# Altium PCB PCB1.PcbDoc
Units mil, origin at the board's own origin, x right, y up, seen from the top; angles counter-clockwise.
Board outline 1270 x 885 mil, 2 copper layers (Top Layer, Bottom Layer); 34 components, 20 nets, 100 pads, 44 vias.
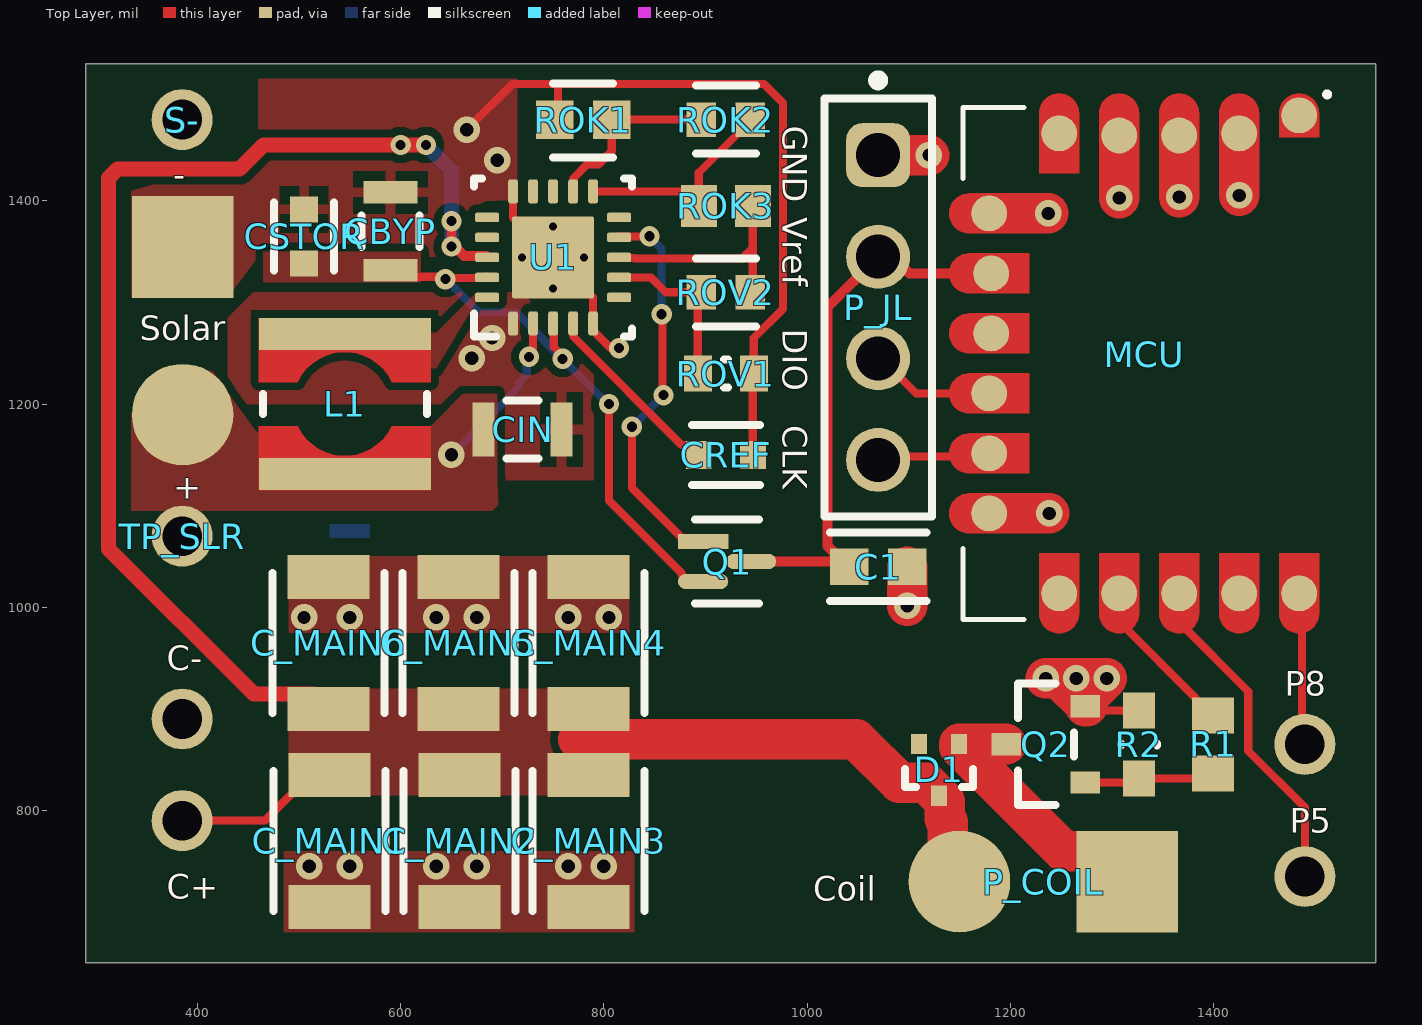
[diagram p0: Top Layer view]
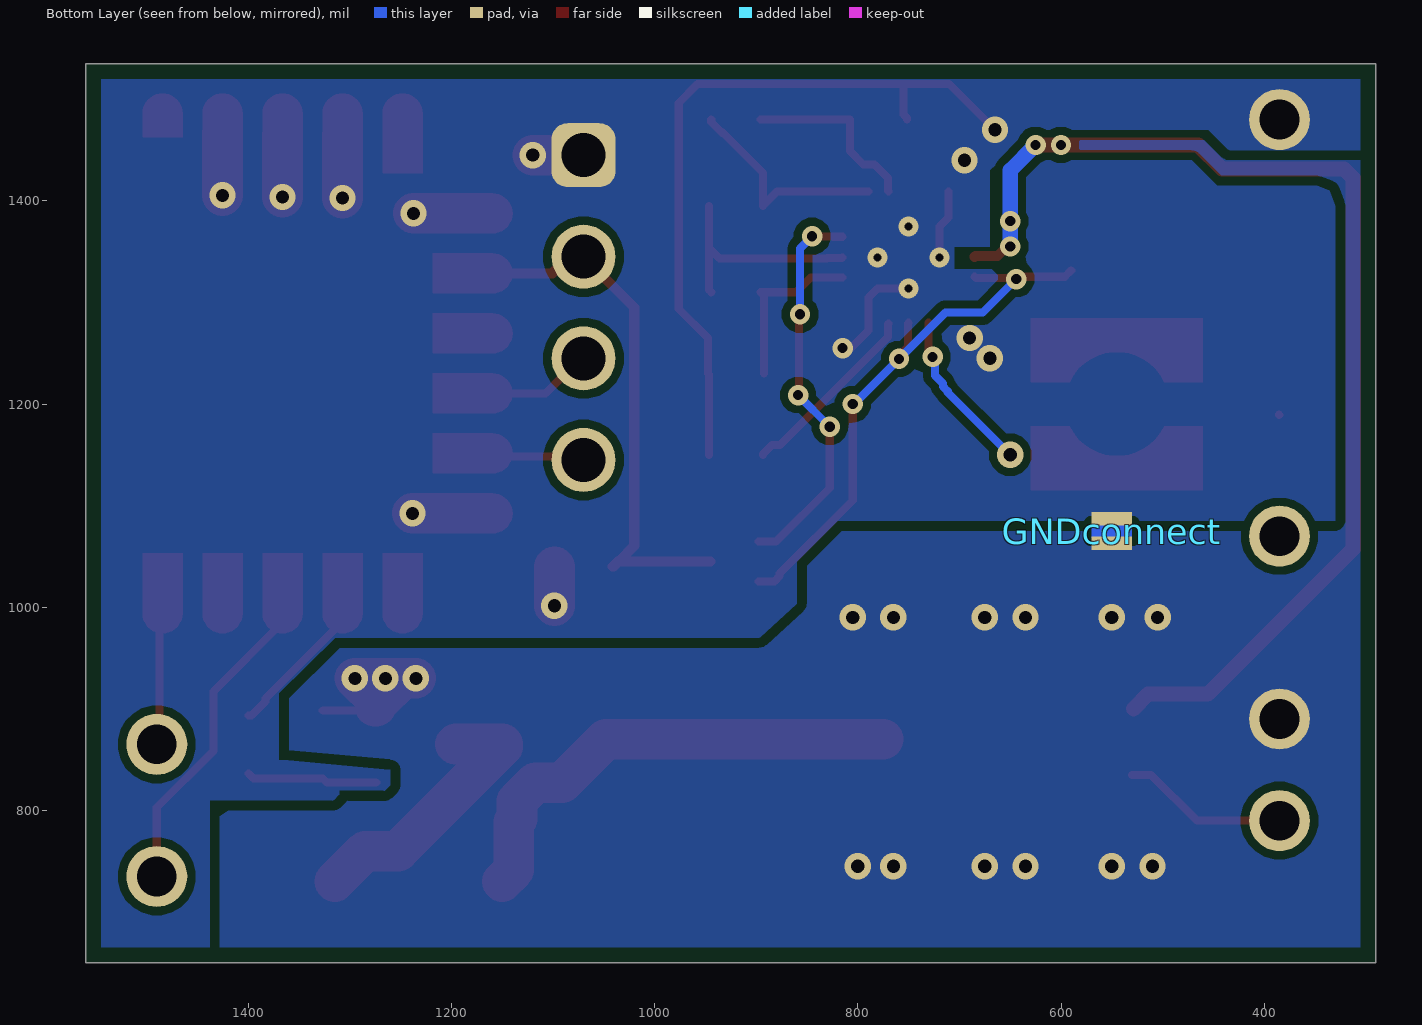
[diagram p1: Bottom Layer view, seen from below]
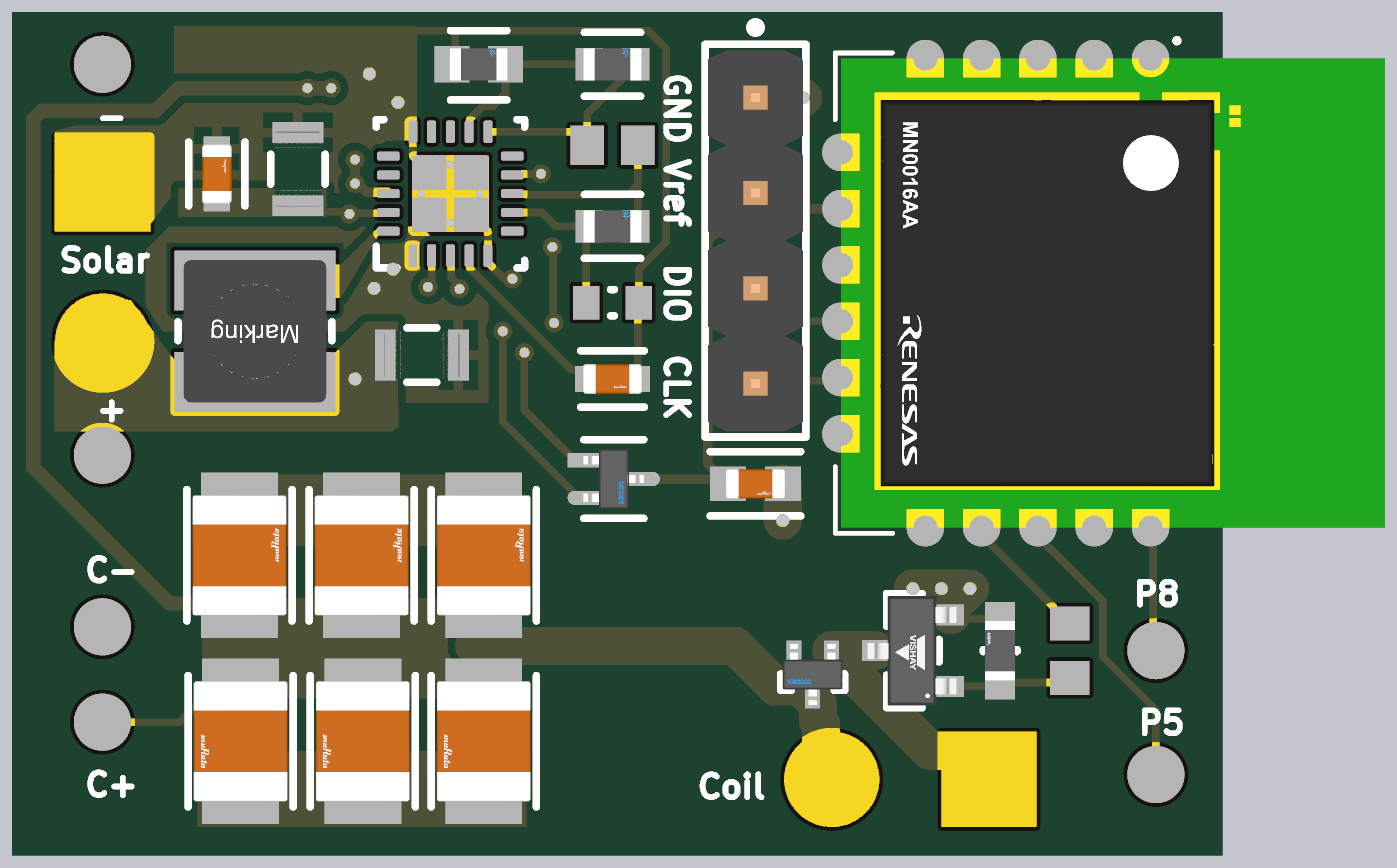
[diagram p2: 3D render of the assembled board from above, using the file's embedded part models]

## Layer stack, top to bottom
Top Solder: solder mask 0.4, Solder Resist, Dk 3.5
Top Layer: signal copper 1.4
Dielectric 1: dielectric 12.6, FR-4, Dk 4.8
Bottom Layer: signal copper 1.4
Bottom Solder: solder mask 0.4, Solder Resist, Dk 3.5

## Board outline
290,650 290,1535 1560,1535 1560,650

## Design rules (kind name [scope] priority, off if disabled: settings)
BoardOutlineClearance [All] p1: gap=15 ignorepadtopadclearanceinfootprint=FALSE
Clearance GNDPourClearance [InNamedPolygon('SGND_L02_P023') vs InNamedPolygon('PGND_L02_P024')] p1: gap=10 ignorepadtopadclearanceinfootprint=TRUE
Clearance PolyTrackConnect [InPolygon AND InNet('SGND') vs IsTrack AND InNet('SGND')] p2: gap=-10 ignorepadtopadclearanceinfootprint=TRUE
Clearance GNDConnect [InComponent('GNDconnect') vs InComponent('GNDconnect')] p3: gap=-10 ignorepadtopadclearanceinfootprint=TRUE
Clearance SGND_PGND [(InNet('SGND') AND IsTrack) vs InNet('PGND')] p4: gap=-10 ignorepadtopadclearanceinfootprint=TRUE
Clearance PolygonPour_C_IN_1 [InNet('NetC_IN_1') vs InNet('NetC_IN_1')] p5: gap=8 ignorepadtopadclearanceinfootprint=TRUE except(-10: Arc-Fill Arc-Poly Arc-Region Track-Fill Track-Poly Track-Region SMDPad-Fill SMDPad-Poly SMDPad-Region THPad-Fill THPad-Poly THPad-Region Via-Fill Via-Poly Via-Region Fill-Fill Fill-Poly Fill-Region Fill-Hole Poly-Poly Poly-Region Poly-Hole Region-Region Region-Hole)
Clearance PolygonPour_C_BYP_1 [InNet('NetC_BYP_1') vs InNet('NetC_BYP_1')] p6: gap=8 ignorepadtopadclearanceinfootprint=TRUE except(-10: Arc-Fill Arc-Poly Arc-Region Track-Fill Track-Poly Track-Region SMDPad-Fill SMDPad-Poly SMDPad-Region THPad-Fill THPad-Poly THPad-Region Via-Fill Via-Poly Via-Region Fill-Fill Fill-Poly Fill-Region Fill-Hole Poly-Poly Poly-Region Poly-Hole Region-Region Region-Hole)
Clearance PolygonPour_L1_2 [InNet('NetL1_2') vs InNet('NetL1_2')] p7: gap=8 ignorepadtopadclearanceinfootprint=TRUE except(-10: Arc-Fill Arc-Poly Arc-Region Track-Fill Track-Poly Track-Region SMDPad-Fill SMDPad-Poly SMDPad-Region THPad-Fill THPad-Poly THPad-Region Via-Fill Via-Poly Via-Region Fill-Fill Fill-Poly Fill-Region Fill-Hole Poly-Poly Poly-Region Poly-Hole Region-Region Region-Hole)
Clearance [All] p8: gap=8 ignorepadtopadclearanceinfootprint=TRUE
ComponentClearance [InComponent('GNDconnect')] p1: gap=-1000 collisioncheckmode=3 verticalgap=-1000 showdistances=TRUE donotcheckwithout3dbody=TRUE
MinimumAnnularRing [All] p1: minimumring=5
MinimumSolderMaskSliver [All] p1: minsoldermaskwidth=8
PolygonConnect DirectConnect_C_BYP_1 [InNet('NetC_BYP_1') vs InNet('NetC_BYP_1')] p1: connectstyle=Direct reliefconductorwidth=10 reliefentries=4 polygonreliefangle="90 Angle" airgapwidth=10
PolygonConnect DirectConnect_L1 [InNet('NetL1_2') vs InNet('NetL1_2')] p2: connectstyle=Direct reliefconductorwidth=10 reliefentries=4 polygonreliefangle="90 Angle" airgapwidth=10
PolygonConnect DirectConnect_SGND [NOT((InComponent('CSTOR') OR InComponent('CBYP')) OR InComponent('CIN')) AND InNet('SGND') vs NOT((InComponent('CSTOR') OR InComponent('CBYP')) OR InComponent('CIN')) AND InNet('SGND')] p3: connectstyle=Direct reliefconductorwidth=10 reliefentries=4 polygonreliefangle="90 Angle" airgapwidth=8
PolygonConnect DirectConnect_VBAT [InNet('VBAT') vs InNet('VBAT')] p4: connectstyle=Direct reliefconductorwidth=10 reliefentries=4 polygonreliefangle="90 Angle" airgapwidth=8
PolygonConnect DirectConnect_PGND [InNet('PGND') vs InNet('PGND')] p5: connectstyle=Direct reliefconductorwidth=10 reliefentries=4 polygonreliefangle="90 Angle" airgapwidth=8
PolygonConnect DirectConnect_C_IN_1 [InNet('NetC_IN_1') vs InNet('NetC_IN_1')] p6: connectstyle=Direct reliefconductorwidth=10 reliefentries=4 polygonreliefangle="90 Angle" airgapwidth=10
PolygonConnect [All] p7: connectstyle=Relief reliefconductorwidth=10 reliefentries=4 polygonreliefangle="90 Angle" airgapwidth=10
RoutingVias [All] p1: holewidth=13 width=26 viastyle="Through Hole" minholewidth=10 minwidth=20 maxholewidth=28 maxwidth=50
SolderMaskExpansion [All] p1: expansion=4 istentingtop=FALSE
SupplyNets "Schematic Supply Nets_1" [InNet('PGND')] p1: voltage=0.000
SupplyNets "Schematic Supply Nets" [InNet('SGND')] p2: voltage=0.000
Width [All] p1: maxlimit=50 minlimit=8 preferedwidth=10 minimp=50.000000 maximp=50.000000 favimp=50.000000
28 further rules are at their usual default settings.

## Components (designator, comment, footprint, x,y, rotation, side; value= is the part's Value field where it differs from the comment)
C1 "GRM188R72A104KA35D" FP-GRM188-0_1-e0_2_0_5-IPC_B 1070,1040 r0 top
C+ "TP" Test_point 385,790 r90 top (schematic designator TP_VBAT)
C- "TP" Test_point 385,890 r90 top (schematic designator TP_GND)
C_MAIN1 "GRM32ER60J227ME05L" FP-GRM32E-0_3-MFG 530,770 r270 top
C_MAIN2 "GRM32ER60J227ME05L" FP-GRM32E-0_3-MFG 658.12,770 r270 top
C_MAIN3 "GRM32ER60J227ME05L" FP-GRM32E-0_3-MFG 785,770 r270 top
C_MAIN4 "GRM32ER60J227ME05L" FP-GRM32E-0_3-MFG 785,965 r90 top
C_MAIN5 "GRM32ER60J227ME05L" FP-GRM32E-0_3-MFG 656.88,965 r90 top
C_MAIN6 "GRM32ER60J227ME05L" FP-GRM32E-0_3-MFG 528.76,965 r90 top
CBYP "CGA4J1X7R1H475K125AC" FP-CGA4J-IPC_C 590,1370 r90 top (schematic designator C_BYP)
CIN "CGA4J1X7R1H475K125AC" FP-CGA4J-IPC_C 720,1175 r0 top (schematic designator C_IN)
CREF "GCM188R72A103KA37D" FP-GCM188-0_1-MFG 920,1150 r0 top (schematic designator C_REF)
CSTOR "GCM188R72A103KA37D" FP-GCM188-0_1-MFG 505,1365 r90 top (schematic designator C_STOR)
D1 "BAT54STA" FP-SOT523-MFG 1130,840 r270 top value=10pF
GNDconnect "GNDconnect" GNDconnect 550,1075 r270 bottom net-tie
L1 "744031220" WE-TPC_3816 545,1200 r180 top
MCU "DA14531MOD-00F0100C" MN0016AA_MFG 1445,1240 r270 top (schematic designator MD)
P5 "TP" Test_point 1490,735 r90 top (schematic designator TP_P5)
P8 "TP" Test_point 1490,865 r90 top (schematic designator TP_P8)
P_COIL "Paired_pads" Paired_pads 1215,730 r270 top
P_JL "61300411121" 61300411121 1070,1295 r270 top
Q1 "DMG1013T-7" FP-SOT523-IPC_B 921.36,1045 r0 top
Q2 "SI2302CDS-T1-E3" FP-S-03946-MFG 1235,865 r180 top
R1 "ERJ-3EKF4700V" RESC1608X55X30ML15T15 1399.64,865 r270 top
R2 "RC0603FR-07100KL" FP-RC0603-0_55-MFG 1326.63,865 r90 top
ROK1 "CRCW06035M62FKEA" FP-CRCW0603-e3-IPC_B 779.68,1480 r0 top (schematic designator R_OK1)
ROK2 "CRCW06035M49FKEA" FP-CRCW0603-e3-IPC_C 920,1480 r0 top (schematic designator R_OK2)
ROK3 "CRCW06031M87FKEA" RESC1609X50X30ML10T20 920,1395 r0 top (schematic designator R_OK3)
ROV1 "7M68 1% 0603(1608)" RESC0603(1608)_L 920,1230 r180 top value="7680000.00 Ohm" (schematic designator R_OV1)
ROV2 "CRCW06035M36FKEA" FP-CRCW0603-e3-IPC_C 920,1310 r0 top (schematic designator R_OV2)
S- "TP" Test_point 385,1480 r90 top (schematic designator TP_SGND)
Solar "Paired_pads" Paired_pads 385.45,1254.55 r0 top (schematic designator P_SLR)
TP_SLR "TP" Test_point 385,1070 r90 top
U1 "BQ25505RGRR" RGR0020A_V 750,1344.3 r90 top

## Footprints (in the part's own frame and the unit in brackets; to place one, negate y for a bottom-side part, rotate by r counter-clockwise, add the part's x,y. Pads: shape width x height; smd on the part's side, far side on the other; paste and mask are expansions set on the pad)
61300411121 [mm] "Pin Header, pitch 2.54 mm, THT, Vertical, single row, 4p"
  rrect50% 1.6x1.6 hole 1.1: 1(-3.81,0)
  round 1.6 hole 1.1: 2(-1.27,0) 3(1.27,0) 4(3.81,0)
  silkscreen extent -5.8,-1.35 5.23,1.35, body extent -5.08,-1.27 5.08,1.27, height 8.57
FP-CGA4J-IPC_C [mm]
  rect 0.556x1.356 smd paste+0 mask+0: 1(-0.975,0) 2(0.975,0)
  silkscreen extent -0.4,-0.72 0.4,0.72, body extent -1.35,-0.82 1.35,0.82, height 0.25
FP-CRCW0603-e3-IPC_B [mil]
  rect 36.81x37.88 smd paste+0 mask+0: 1(-28.17,0) 2(28.17,0)
  silkscreen extent -30,-37 30,35, body extent -56,-29 56,29, height 10
FP-CRCW0603-e3-IPC_C [mil]
  rect 28.94x33.94 smd paste+0 mask+0: 1(-24.23,0) 2(24.23,0)
  silkscreen extent -30,-33 30,33, body extent -43,-23 43,23, height 10
FP-GCM188-0_1-MFG [mm]
  rect 0.65x0.7 smd paste+0 mask+0: 1(-0.675,0) 2(0.675,0)
  silkscreen extent -0.85,-0.75 0.85,0.75, body extent -1.1,-0.55 1.1,0.55, height 0.25
FP-GRM32E-0_3-MFG [mm]
  rect 1.1x2.05 smd paste+0 mask+0: 1(-1.65,0) 2(1.65,0)
  silkscreen extent -1.75,-1.4 1.75,1.4, body extent -2.3,-1.5 2.3,1.5, height 0.25
FP-GRM188-0_1-e0_2_0_5-IPC_B [mil]
  rect 37.74x35.91 smd paste+0 mask+0: 1(-28.61,0) 2(28.61,0)
  silkscreen extent -47,-34 47,34, body extent -57,-28 57,28, height 10
FP-RC0603-0_55-MFG [mm]
  rect 0.9x0.8 smd paste+0 mask+0: 1(-0.85,0) 2(0.85,0)
  silkscreen extent -0.03,-0.45 0.03,0.45, body extent -1.4,-0.55 1.4,0.55, height 0.25
FP-S-03946-MFG [mil]
  rect 29x22 smd paste+0 mask+0: 1(-39,37.5) 2(-39,-37.5) 3(39,0)
  silkscreen extent -28,-60 28,60, body extent -57,-64 57,64, height 10
FP-SOT523-IPC_B [mm]
  rect 1.257x0.376 smd paste+0 mask+0: 1(-0.601,0.5)
  rrect100% 1.257x0.376 smd paste+0 mask+0: 2(-0.601,-0.5) 3(0.601,0)
  silkscreen extent -0.8,-1.05 0.8,1.05, body extent -1.48,-1.05 1.48,1.05, height 0.25
FP-SOT523-MFG [mm]
  rect 0.51x0.4 smd paste+0 mask+0: 1(-0.645,0.5) 2(-0.645,-0.5) 3(0.645,0)
  silkscreen extent -0.02,-0.85 0.43,0.85, body extent -1,-0.95 1,0.95, height 0.25
GNDconnect [mil] "Connection point between SGND and PGND."
  rect 13x40 smd paste-99999 mask+0: P(12,0) S(-12,0)
  Top Layer region: -7,20 7,20 7,-20 -7,-20
MN0016AA_MFG [mm] "Recommended Land Pattern"
  round 0.9 smd paste+0 mask+0: J1(-6.2,1) J2(-5.75,-0.5) J3(-5.699,-2) J4(-5.699,-3.5) J5(-5.75,-5) J6(-3.75,-6.75) J7(-2.25,-6.699) J8(-0.75,-6.699) J9(0.75,-6.75) J10(2.25,-6.75) J11(3.75,-6.75) J12(5.75,-5) J13(5.75,-3.5) J14(5.75,-2) J15(5.75,-0.5) J16(5.75,1)
  Top Layer region: -4.75,-1 -6.25,-1 -6.441,-0.962 -6.604,-0.854 -6.712,-0.691 -6.75,-0.5 -6.75,-0.5 -6.712,-0.309 -6.604,-0.146 -6.441,-0.038 -6.25,0 -6.25,0 -4.75,0
  Top Layer region: -4.75,-2.5 -6.25,-2.5 -6.441,-2.462 -6.604,-2.354 -6.712,-2.191 -6.75,-2 -6.75,-2 -6.712,-1.809 -6.604,-1.646 -6.441,-1.538 -6.25,-1.5 -6.25,-1.5 -4.75,-1.5
  Top Layer region: -4.75,-4 -6.25,-4 -6.441,-3.962 -6.604,-3.854 -6.712,-3.691 -6.75,-3.5 -6.75,-3.5 -6.712,-3.309 -6.604,-3.146 -6.441,-3.038 -6.25,-3 -6.25,-3 -4.75,-3
  Top Layer region: 4.25,-5.75 4.25,-7.25 4.212,-7.441 4.104,-7.604 3.941,-7.712 3.75,-7.75 3.75,-7.75 3.559,-7.712 3.396,-7.604 3.288,-7.441 3.25,-7.25 3.25,-7.25 3.25,-5.75
  Top Layer region: -3.25,-5.75 -3.25,-7.25 -3.288,-7.441 -3.396,-7.604 -3.559,-7.712 -3.75,-7.75 -3.75,-7.75 -3.941,-7.712 -4.104,-7.604 -4.212,-7.441 -4.25,-7.25 -4.25,-7.25 -4.25,-5.75
  Top Layer region: 1.25,-5.75 1.25,-7.25 1.212,-7.441 1.104,-7.604 0.941,-7.712 0.75,-7.75 0.75,-7.75 0.559,-7.712 0.396,-7.604 0.288,-7.441 0.25,-7.25 0.25,-7.25 0.25,-5.75
  Top Layer region: -1.75,-5.75 -1.75,-7.25 -1.788,-7.441 -1.896,-7.604 -2.059,-7.712 -2.25,-7.75 -2.25,-7.75 -2.441,-7.712 -2.604,-7.604 -2.712,-7.441 -2.75,-7.25 -2.75,-7.25 -2.75,-5.75
  Top Layer region: 2.75,-5.75 2.75,-7.25 2.712,-7.441 2.604,-7.604 2.441,-7.712 2.25,-7.75 2.25,-7.75 2.059,-7.712 1.896,-7.604 1.788,-7.441 1.75,-7.25 1.75,-7.25 1.75,-5.75
  Top Layer region: -5.65,0.5 -6.25,0.5 -6.441,0.538 -6.604,0.646 -6.712,0.809 -6.75,1 -6.75,1 -6.712,1.191 -6.604,1.354 -6.441,1.462 -6.25,1.5 -6.25,1.5 -5.65,1.5
  Top Layer region: -4.75,-5.5 -6.25,-5.5 -6.441,-5.462 -6.604,-5.354 -6.712,-5.191 -6.75,-5 -6.75,-5 -6.712,-4.809 -6.604,-4.646 -6.441,-4.538 -6.25,-4.5 -6.25,-4.5 -4.75,-4.5
  Top Layer region: 4.75,-4.5 6.25,-4.5 6.441,-4.538 6.604,-4.646 6.712,-4.809 6.75,-5 6.75,-5 6.712,-5.191 6.604,-5.354 6.441,-5.462 6.25,-5.5 6.25,-5.5 4.75,-5.5
  Top Layer region: 4.75,-3 6.25,-3 6.441,-3.038 6.604,-3.146 6.712,-3.309 6.75,-3.5 6.75,-3.5 6.712,-3.691 6.604,-3.854 6.441,-3.962 6.25,-4 6.25,-4 4.75,-4
  Top Layer region: 4.75,-1.5 6.25,-1.5 6.441,-1.538 6.604,-1.646 6.712,-1.809 6.75,-2 6.75,-2 6.712,-2.191 6.604,-2.354 6.441,-2.462 6.25,-2.5 6.25,-2.5 4.75,-2.5
  Top Layer region: 4.75,0 6.25,0 6.441,-0.038 6.604,-0.146 6.712,-0.309 6.75,-0.5 6.75,-0.5 6.712,-0.691 6.604,-0.854 6.441,-0.962 6.25,-1 6.25,-1 4.75,-1
  Top Layer region: 4.75,1.5 6.25,1.5 6.441,1.462 6.604,1.354 6.712,1.191 6.75,1 6.75,1 6.712,0.809 6.604,0.646 6.441,0.538 6.25,0.5 6.25,0.5 4.75,0.5
  Top Layer region: -0.25,-5.75 -0.25,-7.25 -0.288,-7.441 -0.396,-7.604 -0.559,-7.712 -0.75,-7.75 -0.75,-7.75 -0.941,-7.712 -1.104,-7.604 -1.212,-7.441 -1.25,-7.25 -1.25,-7.25 -1.25,-5.75
  silkscreen extent -6.79,-7.4 6.4,1.76, body extent -6.25,-7.25 6.25,7.25, height 3.05
Paired_pads [mil]
  round 100 / inner round 100 / far side round 0 all layers, no hole: 1(0,-65)
  rect 100x100 / inner round 100 / far side round 0 all layers, no hole: 2(0,100)
RESC0603(1608)_L [mm] "Chip Resistor, Body 1.6x0.8mm, IPC High Density"
  rect 0.7x0.9 smd: 1(-0.7,0) 2(0.7,0)
  silkscreen extent -0.05,-0.35 0.05,0.35, body extent -0.85,-0.47 0.85,0.47, height 0.6
RESC1608X55X30ML15T15 [mm] "Chip Resistor, 2-Leads, Body 1.75x0.95mm, IPC Low Density"
  rect 0.9x1.05 smd: 1(-0.725,0) 2(0.725,0)
  body extent -0.87,-0.48 0.87,0.48, height 0.55
RESC1609X50X30ML10T20 [mm] "Chip Resistor, 2-Leads, Body 1.55x0.85mm, IPC Low Density"
  rect 0.9x1.05 smd: 1(-0.675,0) 2(0.675,0)
  body extent -0.82,-0.48 0.82,0.48, height 0.5
RGR0020A_V [mm] "QFN, 20-Leads, Body 3.5x3.5mm, Pitch 0.5mm, Thermal Pad 2.05x2.05mm, TI Recommended"
  rrect42% 0.6x0.24 smd: 1(-1.65,1) 2(-1.65,0.5) 3(-1.65,0) 4(-1.65,-0.5) 5(-1.65,-1) 11(1.65,-1) 12(1.65,-0.5) 13(1.65,0) 14(1.65,0.5) 15(1.65,1)
  rrect42% 0.24x0.6 smd: 6(-1,-1.65) 7(-0.5,-1.65) 8(0,-1.65) 9(0.5,-1.65) 10(1,-1.65) 16(1,1.65) 17(0.5,1.65) 18(0,1.65) 19(-0.5,1.65) 20(-1,1.65)
  rrect5% 2.05x2.05 smd paste-1.025: 21(0,0)
  silkscreen extent -1.97,-1.97 1.97,1.97, body extent -1.83,-1.83 1.83,1.83, height 1.01
Test_point [mil]
  round 60 / inner round 100 / far side round 60 hole 39 paste-99999 mask+4.02: 1(0,0)
WE-TPC_3816 [mm] "Power Inductor, SMD, 2-Leads, body 3.8x3.8mm"
  rect 4.3x0.8 smd paste-403.566 mask-403.566: 1(0,1.75) 2(0,-1.75)
  Top Layer region: 2.15,-0.55 2.15,-2.15 -2.15,-2.15 -2.15,-0.55 -1.178,-0.55 -0.818,-1.011 -0.292,-1.267 0.292,-1.267 0.818,-1.011 1.178,-0.55 1.178,-0.55
  Top Layer region: -2.15,0.55 -2.15,2.15 2.15,2.15 2.15,0.55 1.178,0.55 0.818,1.011 0.292,1.267 -0.292,1.267 -0.818,1.011 -1.178,0.55 -1.178,0.55
  silkscreen extent -2.05,-0.25 2.05,0.25, body extent -1.9,-1.9 1.9,1.9, height 1.65

## Part data
C1: library part CMP-1035-02595-8, "Chip Multilayer Ceramic Capacitors for General Purpose, 0603, 0.10uF, X7R, 15%, 10%, 100V", Capacitance=100nF, Case Code (Imperial)=0603, Case Code (Metric)=1608, Dielectric=X7R, Max Operating Temperature=125°C, Min Operating Temperature=-55°C, Package Quantity=1, Tolerance=10%, Voltage=100V, Case/Package=0603, Depth=0.8mm, Height=0.8mm, Lead Free="Lead Free", Length=1.6mm, Material=Ceramic, Mount="Surface Mount", Packaging="Tape and Reel", Radiation Hardening=No, REACH SVHC="No SVHC", Termination=SMD/SMT, Thickness=0.035inch, Voltage Rating=100V, Voltage Rating (DC)=100V, Weight=0.000222oz, Width=0.8mm
C_MAIN1 C_MAIN2 C_MAIN3 C_MAIN4 C_MAIN5 C_MAIN6: library part CMP-06035-024340-1, "Chip Multilayer Ceramic Capacitors for General Purpose, 1210, 220uF, X5R, 15%, 20%, 6.3V", Capacitance=220uF, Dielectric=X5R, Tolerance=20%, Voltage Rating (DC)=6.3V, Length=3.2mm, Thickness=2.5mm, Width=2.5mm
CBYP CIN: library part CMP-08246-000171-1, "Cap Ceramic 4.7uF 50V X7R 10% Pad SMD 0805 +125°C Automotive T/R"
CREF CSTOR: library part CMP-2006-02392-2, "Ceramic Capacitor for Automotive 10nF  ±10% 100VDC X7R 0603 Paper T/R", Capacitance=10nF, Case Code (Imperial)=0603, Case Code (Metric)=1608, Dielectric=X7R, Max Operating Temperature=125°C, Min Operating Temperature=-55°C, Package Quantity=1, Ratings=AEC-Q200, Tolerance=10%, Voltage=100V, Case/Package=0603, Depth=0.8mm, Height=0.8mm, Lead Free="Lead Free", Length=1.6mm, Mount="Surface Mount", Packaging="Tape and Reel", Radiation Hardening=No, REACH SVHC="No SVHC", Termination=SMD/SMT, Thickness=0.035inch, Voltage Rating=100V, Voltage Rating (DC)=100V, Width=0.8mm
D1: library part CMP-12790-000041-1, "DIODE ARRAY SCHOTTKY 30V SOT23-3", Capacitance=10pF, Forward Current=200mA, Manufacturer="Diodes Inc.", Max Junction Temp=+150°C, Max Repetitive Reverse Voltage=30V, Max Surge Forward Current=600mA, Package=SOT523, Peak Reverse Current=2uA, Temperature="-65°C to +150°C", Temperature Range Low=-65°C, Automotive=Yes, Automotive Grade="Grade 0", Category=Diode, ComponentLink2Description=Datasheet, ComponentLink2URL=https://www.diodes.com/assets/Datasheets/ds30259.pdf, Device Class L1="Discrete Semiconductors", Device Class L2=Diodes, Device Class L3="Schottky Diodes", Digikey Description="DIODE ARRAY SCHOTTKY 30V SOT23-3", Footprint Url=https://www.diodes.com/assets/Package-Files/SOT523.pdf, Height=0.9mm, Lead Free=Yes, Manufacturer Part Number=BAT54STA, Mouser Description="Schottky Diodes & Rectifiers Series 30V 200mA", Octopart=https://octopart.com/bat54sta-diodes+inc.-326178, Reverse Voltage=30V, RoHS=TRUE, Standoff Height=0mm, Temperature Range High=+150°C
L1: library part CMP-0227-00346-6, "Tiny Power Inductor, SMT, Fixed, 22UH, .51A, .041 Ohm, 3816, We-tpc Series", Ambient Temperature Range High=95°C, Ambient Temperature Range Low=-40°C, Current Rating=510mA, DC Resistance (DCR)=410mΩ, Inductance=22µH, Inductance Tolerance=30%, Manufacturer Lifecycle Status=ACTIVE, Max Operating Temperature=125°C, Saturation Current=360mA, Self Resonant Frequency=26MHz, Series Resistance=450mΩ, Test Frequency=100kHz, Composition=Wirewound, Core Material=Ferrite, Height=1.65mm, Length=3.8mm, Lifecycle Status=Production, Min Operating Temperature=-40°C, Number of Pins=2, RMS Current (Irms)=510mA, RoHS=Compliant, Tolerance=30%, Width=3.8mm
MCU: library part CMP-00572-135729375-1, "SmartBond TINY Bluetooth Low Energy Module", Case/Package=Module, Manufacturer Lifecycle Status=ACTIVE, Max Operating Temperature=85°C, Max Supply Voltage=3.6V, Min Operating Temperature=-40°C, Min Supply Voltage=1.65V, Nominal Supply Voltage (DC)=3V, Package Quantity=300, ComponentLink1Description="Manufacturer's Website", ComponentLink1URL=http://www.renesas.com, ComponentLink2Description="Datasheet URL", ComponentLink2URL=https://octopart.com/cad-content/api/get-model-datasheet/15189/135729375, ComponentLink3Description="Manufacturer's Package Drawing", ComponentLink3URL=https://www.renesas.com/en/document/psc/mn0016aa-16-mod-125-x-145-x-28-mm-body-15mm-pitch-psc-5005-01, Composition=Hybrid, Export Control Classification Number (ECCN) Code=EAR99, Harmonized Tariff Schedule (HTS) Code=8542.39.90, Height - Seated (Max)=3.05mm, HelpURL=https://octopart.com/cad-content/api/get-model-datasheet/15189/135729375, Introduction Date=2020-06-26, Length=14.5mm, Lifecycle Status=Production, MSL=3, Number of Pins=15, Number of Terminals=16, Packaging="Tape & Reel", Part Family=DA14531MOD, Pitch=1.5mm, REACH SVHC=Yes, RoHS=Compliant, Terminal Pitch=1.5mm, Width=12.5mm
P_JL: library part CMP-1502-01064-4, "THT Vertical Pin Header WR-PHD, Pitch 2.54 mm, Single Row, 4 pins", Color=Black, Contact Resistance=20mΩ, Current Rating=3A, Max Operating Temperature=105°C, Min Operating Temperature=-40°C, Operating Supply Voltage=250V, Connector Type="Male Pin", Contact Material=Gold, Contact Mating Length=5.9944mm, Contact Plating=Gold, Gender=Male, Height=8.89mm, Lead Free="Lead Free", Lead Pitch=2.54mm, Mount="Through Hole", Number of Contacts=4, Number of Pins=4, Number of Positions=4, Number of Rows=1, Orientation=Vertical, Packaging=Bulk, Pitch=2.54mm, RoHS=Compliant, Termination=Solder, Voltage Rating=250V
Q1: library part CMP-12801-000011-2, "MOSFET P-CH 20V 0.46A SOT-523", Case/Package=SOT-523, Continuous Drain Current (ID)=460mA, Drain to Source Breakdown Voltage=-20V, Drain to Source Resistance=1R, Drain to Source Voltage (Vdss)=20V, Gate to Source Voltage (Vgs)=6V, Input Capacitance=59.76pF, Max Operating Temperature=150°C, Max Power Dissipation=270mW, Min Operating Temperature=-55°C, On-State Resistance=700mR, Package Quantity=1, Threshold Voltage=-1V, Contact Plating=Tin, Element Configuration=Single, Fall Time=20.7ns, Height=0.8mm, Lead Free="Lead Free", Length=1.7mm, Mount="Surface Mount", Number of Channels=1, Number of Elements=1, Number of Pins=3, Packaging="Tape and Reel", Power Dissipation=270mW, Radiation Hardening=No, Rds On Max=700mR, REACH SVHC="No SVHC", Rise Time=8.1ns, Turn-Off Delay Time=28.4ns, Turn-On Delay Time=5.1ns, Weight=7.1E-05oz, Width=0.85mm
Q2: library part CMP-02550-000184-1, "MOSFET N-CH 20V 2.6A SOT-23", Continuous Drain Current=2.6A, Drain to Source Breakdown Voltage=20V, Drain to Source Resistance=0.045Ω, Gate To Source Voltage=8V, Manufacturer=Vishay, Max Forward Diode Voltage=1.2V, Max Junction Temp=+150°C, Package=S-03946, Power Dissipation=0.71W, Pulse Drain Current=10A, Temperature="-55°C to +150°C", Temperature Range Low=-55°C, Typ Forward Diode Voltage=0.7V, Automotive=No, Category=Trans, ComponentLink2Description=Datasheet, ComponentLink2URL=http://www.vishay.com/docs/68645/si2302cds.pdf, Depletion Mode=False, Device Class L1="Discrete Semiconductors", Device Class L2=Transistors, Device Class L3=MOSFETs, Digikey Description="MOSFET N-CH 20V 2.6A SOT-23", Drain To Source Voltage=20V, Gate Charge At Vgs="3.5nC @ 4.5V", Height=1.12mm, Lead Free=Yes, Manufacturer Part Number=SI2302CDS-T1-E3, Mouser Description="MOSFET 20V 2.9A 0.86W 57mohm @ 4.5V", Number of Channels=1, Number Of N Channels=1, Octopart=https://octopart.com/si2302cds-t1-e3-vishay-44452855, Reverse Recovery Charge=2nC, Reverse Recovery Time=8.5ns, RoHS=TRUE, Rthja Max=140°C/W, Standoff Height=0.01mm, Temperature Range High=+150°C, Threshold Vgs Max=0.85V, Threshold Vgs Min=0.4V, Transconductance=13S, Turn Off Delay Time=30ns, Turn On Delay Time=8ns
R1: library part CMP-1012-00473-6, "Chip Resistor, 470 Ohm, +/- 1%, 0.1 W, -55 to 155 degC, 0603 (1608 Metric), RoHS, Tape and Reel", Manufacturer=Panasonic, Max Operating Temperature="155 degC", Min Operating Temperature="-55 degC", Package Quantity=1, Voltage Rating="75 V", ComponentLink1Description="Manufacturer URL", ComponentLink1URL=http://www.panasonic.com/, ComponentLink2Description=Datasheet, ComponentLink2URL=http://industrial.panasonic.com/cdbs/www-data/pdf/RDA0000/AOA0000C86.pdf, ComponentLink3Description="Package Specification", ComponentLink3URL=https://datasheet.ciiva.com/11808/0900766b80f806dd-11808207.pdf, DatasheetVersion=04/2015, Height="0.45 mm", Length="1.6 mm", Mount="Surface Mount", Mounting Technology="Surface Mount", PackageDescription="2-Pin Surface Mount Device, Body 1.6 x 0.85 mm", PackageReference=0603, Packaging="Tape and Reel", Pins=2, REACH SVHC=Yes, RoHSCompliant=true
R2: library part CMP-2100-03662-2, "RES SMD 100K OHM 1% 1/10W 0603", Case Code (Imperial)=0603, Case Code (Metric)=1608, Max Operating Temperature=155°C, Max Power Dissipation=100mW, Min Operating Temperature=-55°C, Resistance=100kR, Resistance Tolerance=1%, Resistor Type="Thick Film", Temperature Coefficient=100ppm/°C, Voltage Rating=50V, Working Voltage=75V, Case/Package=0603, Construction=Rectangular, Depth=0.8mm, Features="Moisture Resistant", Height=0.45mm, Lead Free="Lead Free", Length=1.6mm, Military Standard=Not, Number of Pins=2, Number of Terminations=2, Packaging="Tape and Reel", Power Rating=100mW, REACH SVHC="No SVHC", RoHS Compliant=Yes, Series=RC, Technology="THICK FILM", Termination=SMD/SMT, Tolerance=1%, Voltage Rating (DC)=50V, Width=0.8mm
ROK1: library part CMP-02407-011800-1, "RES Thick Film, 5.62MΩ, 1%, 0.1W, 100ppm/°C, 0603", Case Code (Imperial)=0603, Case Code (Metric)=1608, Max Operating Temperature=155°C, Max Power Dissipation=100mW, Min Operating Temperature=-55°C, Package Quantity=10, Resistance=5.62MR, Resistance Tolerance=1%, Resistor Type="Thick Film", Temperature Coefficient=100ppm/°C, Voltage Rating=75V, Case/Package=0603, Construction=Rectangular, Contact Plating=Tin, Depth=0.85mm, Features="Automotive AEC-Q200", Height=0.02inch, Lead Free="Lead Free", Length=1.55mm, Military Standard=Not, Number of Pins=2, Number of Terminations=2, Packaging="Tape and Reel", Power Rating=100mW, RoHS Compliant=Yes, Series=CRCW, Tolerance=1%, Voltage Rating (DC)=75V, Weight=7.1E-05oz, Width=0.033inch
ROK2: library part CMP-02407-002627-1, "RES Thick Film, 5.49MΩ, 1%, 0.1W, 100ppm/°C, 0603", Case Code (Imperial)=0603, Case Code (Metric)=1608, Max Operating Temperature=155°C, Max Power Dissipation=100mW, Min Operating Temperature=-55°C, Package Quantity=10, Resistance=5.49MR, Temperature Coefficient=100ppm/°C, Tolerance=1%, Voltage Rating=75V, Case/Package=0603, Composition="Thick Film", Contact Plating=Tin, Depth=0.85mm, Features="Automotive AEC-Q200", Height=0.02inch, Lead Free="Lead Free", Length=1.55mm, Military Standard=Not, Number of Pins=2, Number of Terminations=2, Packaging="Tape and Reel", Power Rating=100mW, Radiation Hardening=No, Termination=SMD/SMT, Voltage Rating (DC)=75V, Weight=7.1E-05oz, Width=0.033inch
ROK3: library part CMP-1012-00878-2, Manufacturer="Vishay Dale", Part Number=CRCW06031M87FKEA
ROV1: library part CMP-1012-00949-1, "7M68 0.1W 1% 0603 (1608 Metric)  SMD", Case-EIA=0603, Case-Metric=1608, Power="0.1 W", Tolerance="1 %", Technology=SMT
ROV2: library part CMP-02407-008561-1, "RES Thick Film, 5.36MΩ, 1%, 0.1W, 100ppm/°C, 0603", Case Code (Imperial)=0603, Case Code (Metric)=1608, Max Operating Temperature=155°C, Max Power Dissipation=100mW, Min Operating Temperature=-55°C, Package Quantity=10, Resistance=5.36MR, Temperature Coefficient=100ppm/°C, Tolerance=1%, Voltage Rating=75V, Case/Package=0603, Composition="Thick Film", Contact Plating=Tin, Depth=0.85mm, Features="Automotive AEC-Q200", Height=0.02inch, Lead Free="Lead Free", Length=1.55mm, Military Standard=Not, Number of Pins=2, Number of Terminations=2, Packaging="Tape and Reel", Power Rating=100mW, Voltage Rating (DC)=75V, Weight=7.1E-05oz, Width=0.033inch
U1: library part CMP-0393-00016-1, "Ultra Low-Power Boost Charger with Battery Management and Autonomous Power Multiplexer for Primary Battery in Energy Harvester Applications, 0.1 to 5.1 V, -40 to 85 degC, 20-Pin VQFN (RGR), Green (RoHS & no Sb/Br), Tape and Reel", Generic Part Number=BQ25505, Temperature Max="85 degC", Temperature Min="-40 degC", ComponentLink1Description="Manufacturer URL", ComponentLink1URL=http://www.ti.com/, ComponentLink2Description=Datasheet, ComponentLink2URL=http://www.ti.com/lit/ds/symlink/bq25505.pdf, ComponentLink3Description="Package Specification", ComponentLink3URL=http://www.ti.com/lit/ml/mpqf239/mpqf239.pdf, DatasheetVersion=SLUSBJ3D, Mounting Technology="Surface Mount", PackageDescription="20-Pin Plastic Quad Flatpack No-Lead, Body 3.5 x 3.5 mm, Pitch 0.5 mm", PackageVersion="4210217/A, 04/2009", Packing="Tape and Reel", PartNumber=BQ25505RGRR, RoHS=TRUE, VIN Max="5.1 V", VIN Min="0.1 V"

## Via types
v1: diameter 26/26 (per signal layer), hole 13, Top Layer to Bottom Layer, tented both sides, 19 vias
v2: diameter 20, hole 10, Top Layer to Bottom Layer, tented both sides, 13 vias
v3: diameter 26, hole 13, Top Layer to Bottom Layer, tented both sides, 8 vias
v4: diameter 19.68, hole 7.87, Top Layer to Bottom Layer, 4 vias

## Nets (pads, with @x,y where several pads share a name; then routed paths per layer and width w, separated by ;. In a path a pad name is that pad's centre, name@x,y a point inside that pad or via, vN(x,y) a via of type N, cw(c..) or ccw(c..) an arc to the next point about the centre after c; other vN are vias at no path point)
NetC_BYP_1: CBYP.1 CSTOR.1 Q1.2 U1.3 U1.19 | length 573.1
  Top Layer w8: CBYP.1 596.34,1325.27 641.77,1325.27 v2(644.06,1322.97) 644.98,1323.89 683.61,1323.89 U1.19@685.04,1325.31 ; U1.3@750,1280.04 750.72,1279.32 750.72,1256.41 759.44,1247.69 v2(759.44,1244.44) ; v2(805,1200) 805,1105 876.97,1033.03 876.97,1030.55 882.2,1025.31 Q1.2
  Bottom Layer w8: v2(644.06,1322.97) 677.04,1290 713.89,1290 v2(759.44,1244.44) 803.89,1200 v2(805,1200)
NetC_IN_1: CIN.1 L1.1 Solar.1 TP_SLR.1 U1.2 | length 163.9
  Top Layer w8: TP_SLR.1 TP_SLR.1@385.23,1070.23 ; Solar.1@385.23,1189.32 Solar.1 ; v2(726.39,1246.39) 726.39,1249.63 730.31,1253.56 U1.2@730.31,1280.04
  Bottom Layer w8: v3(650,1150) 711.56,1211.56 711.56,1212.54 716.24,1217.22 716.24,1220.39 724.09,1228.24 724.09,1244.09 v2(726.39,1246.39)
NetC_REF_1: CREF.1 U1.4 | length 185.3
  Top Layer w8: U1.4 770.41,1278.61 770.41,1265.95 876.58,1159.78 884.63,1159.78 893.43,1150.98 CREF.1
NetD1_1: D1.1 P_COIL.2 Q2.3 | length 269.4
  Top Layer w40: Q2.3 1195.61,865.39 D1.1 1149.68,862.8 1252.49,760 1285,760 P_COIL.2
NetL1_2: L1.2 U1.20
NetMD_J9: MCU.J9 P_JL.3 | length 123.6
  Top Layer w8: P_JL.3 1072.96,1245 1107.48,1210.47 MCU.J9
NetMD_J10: MCU.J10 P_JL.4 | length 111.9
  Top Layer w8: P_JL.4 1073.21,1148.21 1176.04,1148.21 MCU.J10
NetMD_J14: MCU.J14 P5.1 | length 329.9
  Top Layer w8: MCU.J14 1367.46,1012.42 1367.46,983.91 1434.3,917.06 1434.3,858.47 1490,802.77 P5.1
NetMD_J16: MCU.J16 P8.1 | length 151
  Top Layer w8: MCU.J16 1487.18,1010.81 1487.18,867.82 P8.1
NetQ1_1: Q1.1 U1.9 | length 388.4
  Top Layer w8: U1.9@814.98,1364.71 824.22,1364.71 824.41,1364.9 844.79,1364.9 v2(845,1365.11) ; v2(827.63,1177.63) 827.63,1117.42 880.36,1064.68 Q1.1 ; v2(856.87,1288.39) 857.8,1287.45 857.8,1209.67 v2(858.74,1208.74)
  Bottom Layer w8: v2(827.63,1177.63) v2(858.74,1208.74) ; v2(845,1365.11) 856.87,1353.24 v2(856.87,1288.39)
NetQ2_1: Q2.1 R1.2 R2.1 | length 129.3
  Top Layer w8: Q2.1 1322.6,827.5 R2.1 1394.71,831.54 R1.2
NetR_OK1_2: ROK1.2 ROK2.1 U1.12 | length 180.9
  Top Layer w8: U1.12 770.41,1409.98 770.41,1422.64 783.62,1435.85 794.63,1435.85 807.84,1449.06 ROK1.2 ROK2.1
NetR_OK2_2: ROK2.2 ROK3.1 U1.11 | length 216.4
  Top Layer w8: U1.11 879.71,1409.26 ROK3.1@893.43,1395.54 ; ROK3.1 ROK3.1@893.43,1395.54 ; ROK2.2 944.23,1477.5 933.76,1467.03 932.78,1467.03 893.43,1427.67 ROK3.1@893.43,1395.54
NetR_OK3_2: ROK3.2 ROV2.2 U1.8 | length 222.5
  Top Layer w8: U1.8 815.68,1343.57 829.72,1343.57 830.18,1343.11 936.01,1343.11 946.57,1353.67 ; ROV2.2 946.57,1312.35 946.57,1353.67 ; ROK3.2 946.57,1353.67
NetR_OV1_2: ROV1.2 ROV2.1 U1.7 | length 168.2
  Top Layer w8: U1.7 846.37,1324.61 860.98,1310 ROV2.1 892.44,1306.67 ROV1.2
PEN: MCU.J13 R1.1 | length 160.1
  Top Layer w8: MCU.J13 1309.27,1011.55 1309.27,983.91 1382.97,910.21 1382.97,907.26 1396.68,893.54 R1.1
PGND: C-.1 C_MAIN1.2 C_MAIN2.2 C_MAIN3.2 C_MAIN4.2 C_MAIN5.2 C_MAIN6.2 GNDconnect.P Q2.2 R2.2 | length 214.1
  Top Layer w8: Q2.2@1279.54,898.46 R2.2
  Top Layer w24: Q2.2 1275.5,902.5 Q2.2@1279.54,898.46
  Top Layer w40: v1(1235,930) 1248,930 ; Q2.2 Q2.2@1274,904 ; Q2.2@1275.5,902.5 Q2.2@1274,904 ; 1248,930 v1(1265,930) ; 1248,930 Q2.2@1274,904 ; v1(1265,930) v1(1295,930) Q2.2@1274,909 ; v1(1265,930) 1274,921 Q2.2@1274,909 ; Q2.2@1274,904 Q2.2@1274,909
  other v1: 510,745 550,745 635,745 675,745 765,745 800,745 505,990 550,990 635,990 675,990 765,990 805,990
SGND: C1.2 CBYP.2 CIN.2 CREF.2 CSTOR.2 GNDconnect.S MCU.J2 MCU.J3 MCU.J4 MCU.J6 MCU.J11 P_JL.1 ROK1.1 ROV1.1 S-.1 Solar.2 U1.1 U1.5 U1.15 U1.21 | length 1299
  Top Layer w8: v1(665,1470) 710,1515 755,1515 ; U1.15 710.63,1383.67 719.49,1374.81 v4(719.49,1344.3) ; v4(750,1313.79) 780.51,1313.79 789.37,1304.93 U1.5 789.37,1272.25 806.62,1255 v2(815,1255) ; ROK1.1 751.51,1481.51 755,1485 755,1515 ; CREF.2 946.57,1229.02 ROV1.1 947.56,1264.92 976.29,1293.65 976.29,1496.35 957.64,1515 755,1515
  Top Layer w40: P_JL.1 v3(1120,1445) ; v3(1098.61,1001.39) C1.2 ; MCU.J11 v3(1238.31,1092.36) ; MCU.J6 v3(1237.36,1387.64) ; v3(1307.2,1402.8) MCU.J4 ; v3(1366.26,1403.74) MCU.J3 ; v3(1425.31,1405.31) MCU.J2
  other v1: 670,1245 690,1265 695,1440
  other v4: 780.51,1344.3 750,1374.81
VBAT: C+.1 C_MAIN1.1 C_MAIN2.1 C_MAIN3.1 C_MAIN4.1 C_MAIN5.1 C_MAIN6.1 D1.3 P_COIL.1 U1.18 | length 1781.5
  Top Layer w8: C+.1 466.34,790 511.3,834.96 C_MAIN1.1
  Top Layer w10: v2(650,1380) v2(650,1355) 653.25,1355 662.52,1345.72 684.31,1345.72 U1.18@685.04,1345
  Top Layer w15: C_MAIN6.1 514.29,914.51 455.49,914.51 312.5,1057.5 312.5,1422.55 321.29,1431.33 441.33,1431.33 465,1455 v2(600,1455) v2(625,1455)
  Top Layer w40: 775,870 1048.2,870 1090.84,827.35 1117.25,827.35 D1.3 1135.46,809.15 1135.46,791.66 1138.52,788.6 1138.52,741.48 P_COIL.1
  Bottom Layer w15: v2(625,1455) 650,1430 v2(650,1380) v2(650,1355)
VDD: C1.1 MCU.J7 P_JL.2 Q1.3 | length 551.6
  Top Layer w10: Q1.3 C1.1@1035.47,1045 ; MCU.J7 1100.76,1328.58 1084.34,1345 P_JL.2 1020,1295 1020,1060.47 C1.1@1035.47,1045 ; C1.1@1035.47,1045 1036.39,1045 C1.1 1040.47,1040 C1.1@1035.47,1045
pads on no net: D1.2 MCU.J1 MCU.J5 MCU.J8 MCU.J12 MCU.J15 U1.6 U1.10 U1.13 U1.14 U1.16 U1.17

## Polygon pours and split planes (outlines as drawn)
NetC_IN_1 on Top Layer "NETC_IN_1_L01_P000" (solid, remove dead copper, pour order 0): 383.06,1238.06 415,1232.5 453.9,1178.35 461.65,1178.35 546.02,1145.55 629.65,1178.35 661.3,1210 695,1210 695,1133.57 696.09,1095 335,1095 335,1190 362.5,1232.5
SGND on Top Layer "SGND_L01_P009" (solid, remove dead copper, pour order 9): 715,1520 715,1400.58 683.94,1399.68 664.66,1389.66 655.77,1394.35 644.83,1395.17 637.76,1388.11 636.8,1378.26 638.3,1345 460,1345 430,1305 335,1305 335,1410 460,1445 460,1520
SGND on Top Layer "SGND_L01_P016" (solid, remove dead copper, pour order 16): 455,1310 719.34,1310 790,1239.34 790,1125 640.3,1125 639.74,1199.91 430,1199.91 430,1285
VBAT on Top Layer "VBAT_L01_P007" (solid, remove dead copper, pour order 7): 825,815 490,815 490,920 825,920
PGND on Top Layer "PGND_L01_P008" (solid, remove dead copper, pour order 8): 830,680 485,680 485,760 830,760
NetL1_2 on Top Layer "NETL1_2_L01_P004" (solid, remove dead copper, pour order 4): 635,1270 675,1310 675,1301.53 635,1235 625,1235 625,1270
NetC_BYP_1 on Top Layer "NETC_BYP_1_L01_P005" (solid, remove dead copper, pour order 5): 465,1350 620,1350 620,1320 465,1320
PGND on Top Layer "PGND_L01_P018" (solid, remove dead copper, pour order 18): 825,1050 825,975 490,975 490,1050
PGND on Bottom Layer "PGND_L02_P024" (solid, remove dead copper, pour order 24): 285,1540 285,645 1433.1,645 1438.1,650 1438.09,831.9 1185,1085 645,1085 645,1540
SGND on Bottom Layer "SGND_L02_P023" (solid, remove dead copper, pour order 23): 1560,1540 1560,650 1438.1,650 1438.1,810 1310.52,809.75 1310.52,819.9 1260,819.08 1260,840 1370,850 1370,915.55 1314.32,970 897,970 860,1003.64 860,1045 820,1085 330,1085 330,1395 335.66,1410.11 348.78,1415 446.35,1415 471.35,1440 620,1440 635,1425 635,1340 655,1340 662.27,1332.73 705,1332.73 705,1355 670,1355 670,1430 630,1470 455,1470 435,1450 285,1450 285,1540

## Silkscreen, mask and mechanical layers (free items; w line width, h text height)
Top Overlay:
  text "GND" at 976,1474 h24 r270
  text "-" at 376,1414 h24
  text "Vref" at 976,1384 h24 r270
  text "DIO" at 976,1274 h24 r270
  text "CLK" at 976,1179 h24 r270
  text "+" at 376,1107 h24
  text "Coil" at 1006,711 h24
Mechanical 1:
  the board outline again, w10